# Altium PCB PCB_Controlev2.PcbDoc
Units mm, origin at the board's own origin, x right, y up, seen from the top; angles counter-clockwise.
Board outline 100 x 65 mm, 2 copper layers (Top Layer, Bottom Layer); 12 components, 36 nets, 118 pads, 4 vias.
Unrouted connection lines stored in the file: 2.
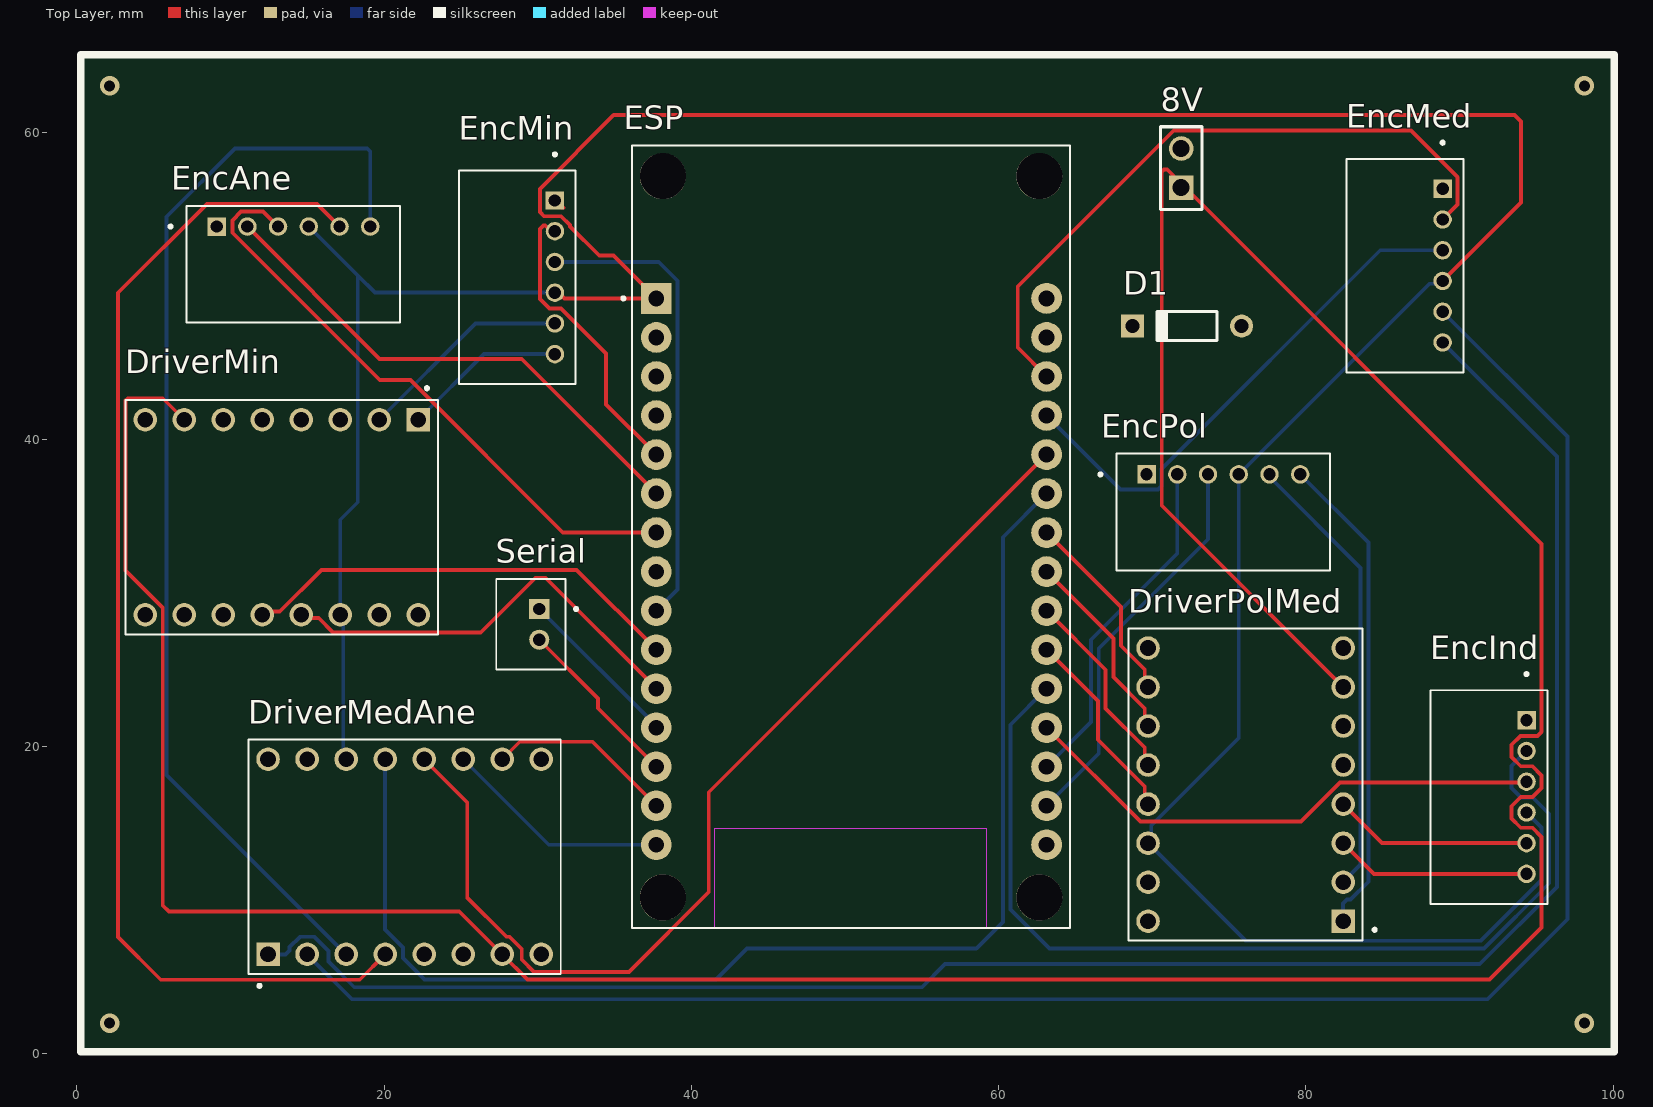
[diagram p0: Top Layer view]
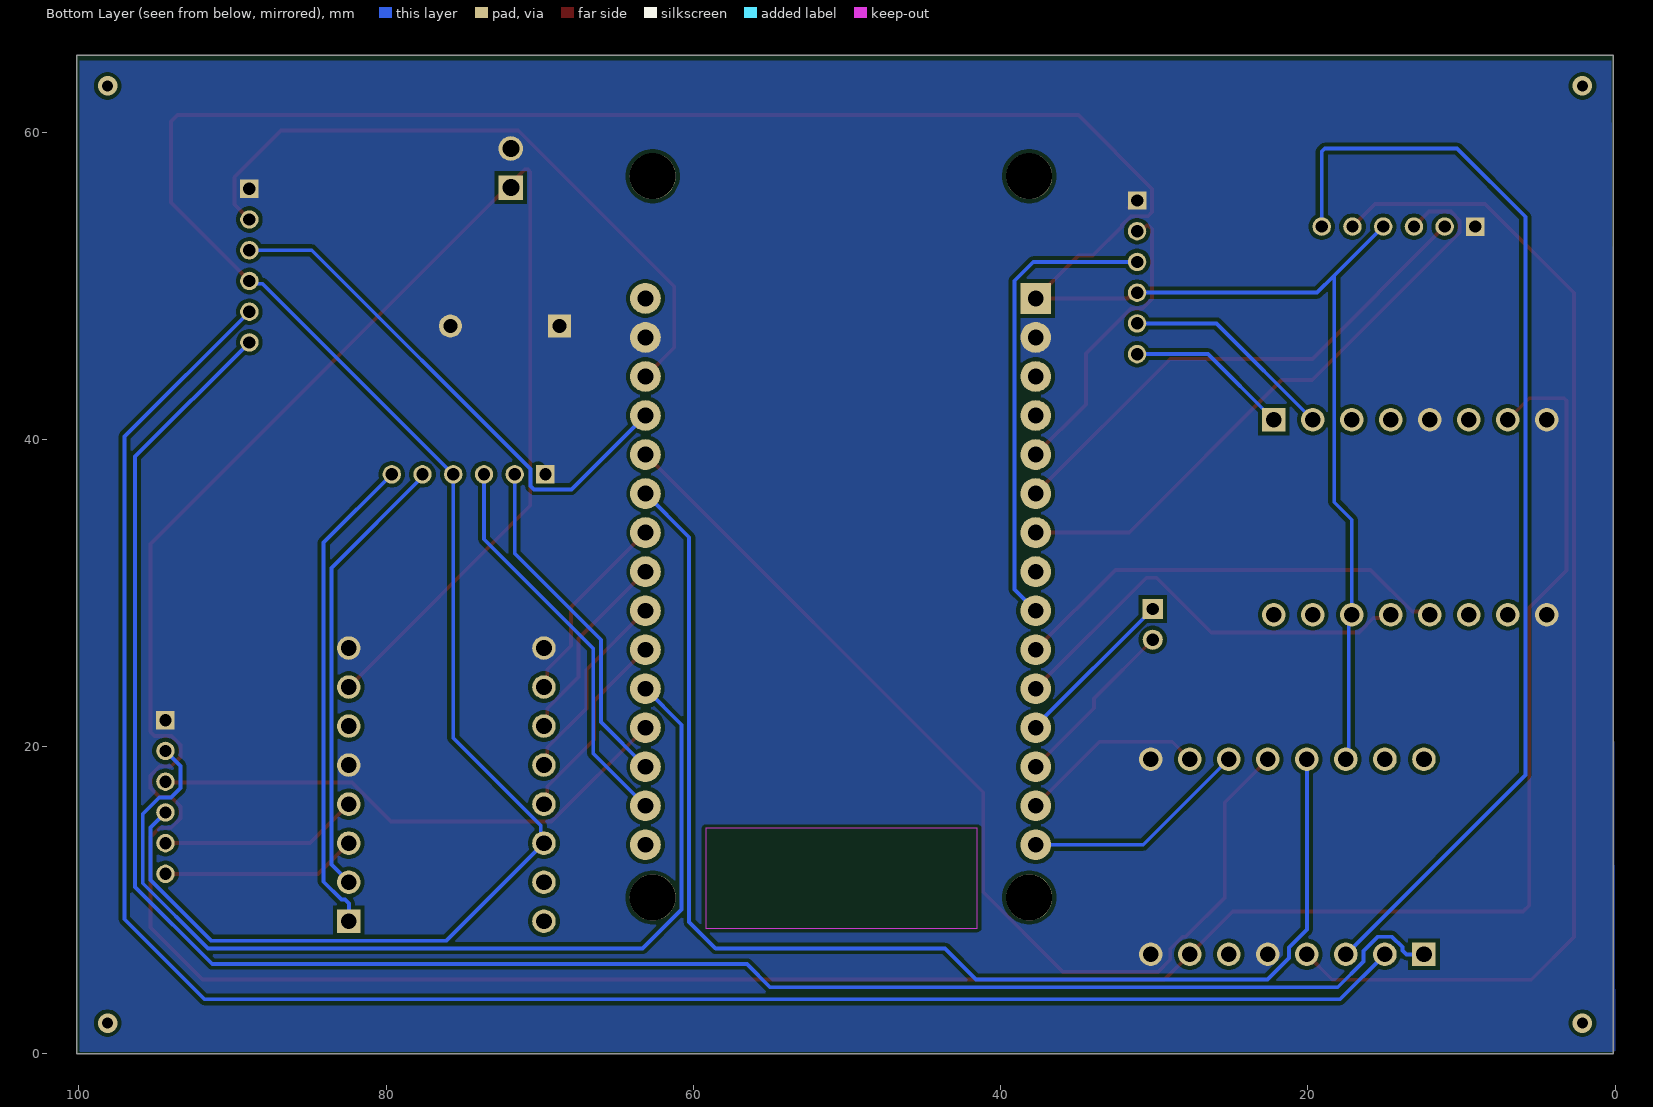
[diagram p1: Bottom Layer view, seen from below]

## Layer stack, top to bottom
Top Solder: solder mask 0.0102, Solder Resist, Dk 3.5
Top Layer: signal copper 0.0356
Dielectric 1: dielectric 0.32, FR-4, Dk 4.8
Bottom Layer: signal copper 0.0356
Bottom Solder: solder mask 0.0102, Solder Resist, Dk 3.5

## Board outline
0.127,0 100.127,0 100.127,65 0.127,65

## Design rules (kind name [scope] priority, off if disabled: settings)
Clearance [All] p1: gap=0.25 ignorepadtopadclearanceinfootprint=FALSE
HoleSize [All] p1: absolutevalues=TRUE maxlimit=1.2 minlimit=0.4 maxpercent=80.000 minpercent=20.000
PolygonConnect [All] p1: connectstyle=Direct reliefconductorwidth=0.254 reliefentries=4 polygonreliefangle="90 Angle" airgapwidth=0.254
RoomDefinition Sheet_Control [InComponentClass('Sheet_Control')] p1: confinementstyle=ConfineIn formatcopy=TRUE lockcomponents=FALSE outline 2.032,2.921 98.425,2.921 98.425,62.865 2.032,62.865
RoutingVias [All] p1: holewidth=0.4 width=1.2 viastyle="Through Hole" minholewidth=0.4 minwidth=1.2 maxholewidth=10 maxwidth=10
SilkToSilkClearance [All] p1: silktosilkclearance=0.25
SolderMaskExpansion [All] p1: expansion=0.102 istentingtop=FALSE
Width [All] p1: maxlimit=10 minlimit=0.25 preferedwidth=0.25
28 further rules are at their usual default settings.

## Components (designator, comment, footprint, x,y, rotation, side; value= is the part's Value field where it differs from the comment)
8V "61300211121" 61300211121 71.882,57.658 r90 top
D1 "Diode 1N4148" DO-35 72.263,47.371 r180 top (schematic designator D?)
DriverMedAne "A4990_STEPPER_MOTOR_DRIVER_CARRIER" MODULE_A4990_STEPPER_MOTOR_DRIVER_CARRIER 21.336,12.827 r90 top
DriverMin "A4990_STEPPER_MOTOR_DRIVER_CARRIER" MODULE_A4990_STEPPER_MOTOR_DRIVER_CARRIER 13.335,34.925 r270 top
DriverPolMed "A4990_STEPPER_MOTOR_DRIVER_CARRIER" MODULE_A4990_STEPPER_MOTOR_DRIVER_CARRIER 76.073,17.526 r180 top
EncAne "S6B-PH-K-S(LF)(SN)" JST_S6B-PH-K-S(LF)(SN) 14.097,53.848 r0 top
EncInd "S6B-PH-K-S(LF)(SN)" JST_S6B-PH-K-S(LF)(SN) 94.361,16.716 r270 top
EncMed "S6B-PH-K-S(LF)(SN)" JST_S6B-PH-K-S(LF)(SN) 88.9,51.308 r270 top
EncMin "S6B-PH-K-S(LF)(SN)" JST_S6B-PH-K-S(LF)(SN) 31.115,50.546 r270 top
EncPol "S6B-PH-K-S(LF)(SN)" JST_S6B-PH-K-S(LF)(SN) 74.628,37.719 r0 top
ESP "ESP32-DEVKIT-V1" ESP32_DEVKIT_V1 50.419,33.655 r0 top
Serial "B2B-PH-K-S" JST_B2B-PH-K-S 29.549,27.956 r90 top

## Footprints (in the part's own frame and the unit in brackets; to place one, negate y for a bottom-side part, rotate by r counter-clockwise, add the part's x,y. Pads: shape width x height; smd on the part's side, far side on the other; paste and mask are expansions set on the pad)
61300211121 [mm] "Pin Header, pitch 2.54 mm, THT, Vertical, single row, 2p"
  rect 1.6x1.6 hole 1.1: 1(-1.27,0)
  round 1.6 hole 1.1: 2(1.27,0)
  silkscreen extent -2.69,-1.35 2.69,1.35, body extent -2.54,-1.27 2.54,1.27, height 8.57
DO-35 [mm] "Diode, Axial; Body 3.8 x 1.9 mm (LxDia. max), Lead Dia. 0.53 mm (max)"
  round 1.5 hole 0.9: 1(-3.55,0)
  rect 1.5x1.5 hole 0.9: 2(3.55,0)
  silkscreen extent -1.95,-0.95 2.05,0.95, body extent -4.06,-1.27 4.06,1.22, height 3.23
ESP32_DEVKIT_V1 [mm]
  rect 2x2 hole 1.02: 1(-12.7,15.515)
  round 2 hole 1.02: 2(-12.7,12.975) 3(-12.7,10.435) 4(-12.7,7.895) 5(-12.7,5.355) 6(-12.7,2.815) 7(-12.7,0.275) 8(-12.7,-2.265) 9(-12.7,-4.805) 10(-12.7,-7.345) 11(-12.7,-9.885) 12(-12.7,-12.425) 13(-12.7,-14.965) 14(-12.7,-17.505) 15(-12.7,-20.045) 16(12.7,-20.045) 17(12.7,-17.505) 18(12.7,-14.965) 19(12.7,-12.425) 20(12.7,-9.885) 21(12.7,-7.345) 22(12.7,-4.805) 23(12.7,-2.265) 24(12.7,0.275) 25(12.7,2.815) 26(12.7,5.355) 27(12.7,7.895) 28(12.7,10.435) 29(12.7,12.975) 30(12.7,15.515)
  round 3 hole 3 unplated: ""(-12.28,-23.475) ""(-12.28,23.475) ""(12.23,-23.475) ""(12.23,23.475)
  Keep-Out Layer region: 8.78,-25.475 -8.91,-25.475 -8.91,-18.985 8.78,-18.985
  Keep-Out Layer region: 8.78,-25.475 -8.91,-25.475 -8.91,-18.985 8.78,-18.985
  Keep-Out Layer region: 8.78,-25.475 -8.91,-25.475 -8.91,-18.985 8.78,-18.985
  silkscreen extent -14.95,-25.48 14.23,25.48, body extent -14.48,-25.5 14.02,25.43, height 9.22
JST_B2B-PH-K-S [mm]
  rect 1.308x1.308 / inner round 1.308 / far side rect 1.308x1.308 hole 0.8: 1(1,-0.55)
  round 1.308 hole 0.8: 2(-1,-0.55)
  silkscreen extent -2.95,-3.05 2.95,2.25, body extent -2.95,-2.25 2.95,2.25, height 6
JST_S6B-PH-K-S(LF)(SN) [mm]
  rect 1.2x1.2 hole 0.8: 1(-5,0)
  round 1.2 hole 0.8: 2(-3,0) 3(-1,0) 4(1,0) 5(3,0) 6(5,0)
  silkscreen extent -8.1,-6.25 6.95,1.35
MODULE_A4990_STEPPER_MOTOR_DRIVER_CARRIER [mm]
  rect 1.53x1.53 hole 1.02: 1(-6.35,8.89)
  round 1.53 hole 1.02: 2(-6.35,6.35) 3(-6.35,3.81) 4(-6.35,1.27) 5(-6.35,-1.27) 6(-6.35,-3.81) 7(-6.35,-6.35) 8(-6.35,-8.89) 9(6.35,-8.89) 10(6.35,-6.35) 11(6.35,-3.81) 12(6.35,-1.27) 13(6.35,1.27) 14(6.35,3.81) 15(6.35,6.35) 16(6.35,8.89)
  silkscreen extent -8.5,-10.16 7.62,10.16

## Part data
8V: "WR-PHD Pin Header, THT, pitch 2.54mm, Single Row, Vertical, 2pin", Contact Resistance=20mOhm, Operating Temperature="-40 to +105degC", Rated Current=3A, Withstanding Voltage=500VAC, Working Voltage=250VAC, ComponentLink1Description=Manufacturer, ComponentLink1URL=http://www.we-online.de, ComponentLink2Description=Datasheet, ComponentLink2URL=https://katalog.we-online.de/em/datasheet/6130xx11121.pdf, Gender=Male, Mounting Technology=THT, Orientation=Vertical, Packaging=Bag, Part Number=61300211121, Pin Number=2, Pitch=2.54mm, Published Date="June 2019", Publisher="Wurth Elektronik", Row Number=Single
D1: "High Conductance Fast Diode", Code_JEDEC=DO-204-AH, ComponentLink1Description="Manufacturer Link", ComponentLink1URL=http://www.fairchildsemi.com/, ComponentLink2Description=Datasheet, ComponentLink2URL=http://www.fairchildsemi.com/ds/1N%2F1N4148.pdf, DatasheetVersion=1997, LatestRevisionDate=17-Jul-2002, LatestRevisionNote="Re-released for DXP Platform.", PackageDescription="Diode, Axial; Body 3.8 x 1.9 mm (LxDia. max), Lead Dia. 0.53 mm (max)", PackageReference=DO-35, Published=8-Jun-2000, Publisher="Altium Limited"
DriverMedAne DriverMin DriverPolMed: "Stepper motor controler; IC: A4990", Package=None, Availability=Unavailable, MP=A4988_STEPPER_MOTOR_DRIVER_CARRIER, Price=None
EncAne EncInd EncMed EncMin EncPol: "PH Series 6 Position 2 mm Pitch Through Hole Side Entry Shrouded Header", Package=None, Availability=Unavailable, MP=S6B-PH-K-S(LF)(SN), Price=None
ESP: "Dual core, Wi-Fi: 2.4 GHz up to 150 Mbits/s,BLE (Bluetooth Low Energy) and legacy Bluetooth, 32 bits, Up to 240 MHz", Package=None, Availability="Not in stock", Check_prices=https://www.snapeda.com/parts/ESP32-DEVKIT-V1/Do+it/view-part/?ref=eda, MF="Do it", MP=ESP32-DEVKIT-V1, Price=None, SnapEDA_Link=https://www.snapeda.com/parts/ESP32-DEVKIT-V1/Do+it/view-part/?ref=snap
Serial: "Connector Header Through Hole 2 position 0.079 (2.00mm)", Package=None, Check_prices=https://www.snapeda.com/parts/B2B-PH-K-S/JST/view-part/?ref=eda, MF="JST Sales America Inc.", MP=B2B-PH-K-S, SnapEDA_Link=https://www.snapeda.com/parts/B2B-PH-K-S/JST/view-part/?ref=snap

## Via types
v1: diameter 1.27, hole 0.711, Top Layer to Bottom Layer, 4 vias

## Nets (pads, with @x,y where several pads share a name; then routed paths per layer and width w, separated by ;. In a path a pad name is that pad's centre, name@x,y a point inside that pad or via, vN(x,y) a via of type N, cw(c..) or ccw(c..) an arc to the next point about the centre after c; other vN are vias at no path point)
Net8V_1: 8V.1 D1.1 DriverMedAne.7 DriverMin.7 DriverPolMed.7 | length 234.9
  Top Layer w0.25: DriverMin.7 5.588,42.672 3.321,42.672 3.175,42.526 3.175,31.457 5.585,29.047 5.585,9.674 5.988,9.271 24.892,9.271 DriverMedAne.7 29.326,4.837 91.959,4.837 95.336,8.214 95.336,14.12 94.74,14.716 93.982,14.716 93.386,15.312 93.386,16.12 93.982,16.716 94.74,16.716 95.336,17.312 95.336,18.12 94.74,18.716 93.982,18.716 93.386,19.312 93.386,20.12 93.957,20.691 95.066,20.691 95.336,20.961 95.336,33.188 70.971,57.553 70.764,57.553 70.618,57.406 70.618,35.681 DriverPolMed.7
Net8V_2: 8V.2 DriverMedAne.5 DriverMedAne.8 DriverMedAne.9 DriverMin.5 DriverMin.8 DriverMin.9 DriverPolMed.5 DriverPolMed.8 DriverPolMed.9 EncAne.1 EncInd.1 EncMed.1 EncMin.1 EncPol.1 ESP.2 ESP.29 | length 2.2
  Top Layer w0.25: DriverMedAne.9@30.226,19.158 DriverMedAne.9 ; EncMin.1 31.59,55.071 EncMin.1@31.676,55.071 ; EncPol.1 EncPol.1@69.723,37.624 ; DriverPolMed.5 DriverPolMed.5@82.635,19.008 ; DriverPolMed.8 DriverPolMed.8@82.658,26.181
  Bottom Layer w0.25: EncPol.1 EncPol.1@70.103,38.194
NetD?_2: D1.2 ESP.30
NetDriverMedAne_1: DriverMedAne.1 EncMed.6 | length 127.5
  Bottom Layer w0.25: DriverMedAne.1 13.586,6.477 13.846,6.737 13.846,6.949 14.514,7.617 15.458,7.617 16.386,6.689 16.386,6.005 18.054,4.337 55.01,4.337 56.515,5.842 91.313,5.842 96.336,10.865 96.336,38.872 EncMed.6
NetDriverMedAne_2: DriverMedAne.2 EncMed.5 | length 128.3
  Bottom Layer w0.25: DriverMedAne.2 17.907,3.556 91.821,3.556 97.028,8.763 97.028,40.18 EncMed.5
NetDriverMedAne_3: DriverMedAne.3 EncAne.6 | length 72.9
  Bottom Layer w0.25: DriverMedAne.3 5.845,18.158 5.845,54.486 10.287,58.928 18.904,58.928 19.097,58.735 EncAne.6
NetDriverMedAne_4: DriverMedAne.4 EncAne.5 | length 78.6
  Top Layer w0.25: EncAne.5 15.622,55.323 8.46,55.323 2.675,49.538 2.675,7.612 5.461,4.826 18.415,4.826 DriverMedAne.4
NetDriverMedAne_10: DriverMedAne.10 ESP.14 | length 12.2
  Top Layer w0.25: DriverMedAne.10 28.826,20.317 33.552,20.317 ESP.14
NetDriverMedAne_11: DriverMedAne.11 ESP.15 | length 14.9
  Bottom Layer w0.25: DriverMedAne.11 30.713,13.61 ESP.15
NetDriverMedAne_12: DriverMedAne.12 ESP.26 | length 68
  Top Layer w0.25: DriverMedAne.12 25.405,16.378 25.405,10.174 27.959,7.62 28.155,7.62 28.954,6.821 28.954,6.136 29.754,5.337 35.948,5.337 41.134,10.523 41.134,17.025 ESP.26
NetDriverMedAne_13: DriverMedAne.13 ESP.25 | length 83.7
  Bottom Layer w0.25: DriverMedAne.13 20.066,8.089 21.222,6.933 21.222,6.248 22.634,4.837 41.607,4.837 43.628,6.858 58.547,6.858 60.274,8.585 60.274,33.625 ESP.25
NetDriverMedAne_14: DriverMedAne.14 DriverMin.14 DriverPolMed.14 EncAne.4 EncInd.4 EncMed.4 EncMin.4 EncPol.4 ESP.1 | length 226.3
  Top Layer w0.25: EncMin.4 31.372,49.546 31.748,49.17 ESP.1 34.935,51.954 33.999,51.954 32.09,53.864 32.09,53.95 31.519,54.521 30.41,54.521 30.14,54.791 30.14,56.301 34.942,61.103 93.583,61.103 93.999,60.687 93.999,55.407 EncMed.4
  Bottom Layer w0.25: EncAne.4 18.285,50.66 ; DriverMedAne.14 17.335,19.367 17.335,28.384 DriverMin.14 17.145,34.764 18.285,35.904 18.285,50.66 ; EncMin.4 19.399,49.546 18.285,50.66 ; EncMed.4 88.718,50.126 88.035,50.126 EncPol.4 75.628,20.549 69.935,14.856 69.935,13.928 DriverPolMed.14 76.073,7.366 91.39,7.366 95.336,11.312 95.336,14.741 EncInd.4
NetDriverMin_1: DriverMin.1 EncMin.6 | length 10.7
  Bottom Layer w0.25: DriverMin.1 26.496,45.546 EncMin.6
NetDriverMin_2: DriverMin.2 EncMin.5 | length 14
  Bottom Layer w0.25: DriverMin.2 25.956,47.546 EncMin.5
NetDriverMin_12: DriverMin.12 ESP.10 | length 29
  Top Layer w0.25: DriverMin.12 12.277,28.787 13.205,28.787 15.914,31.496 32.533,31.496 ESP.10
NetDriverMin_13: DriverMin.13 ESP.11 | length 28
  Top Layer w0.25: DriverMin.13 14.817,28.363 15.745,28.363 16.673,27.435 26.292,27.435 29.845,30.988 30.501,30.988 ESP.11
NetDriverPolMed_1: DriverPolMed.1 EncPol.6 | length 31.7
  Bottom Layer w0.25: EncPol.6 84.063,33.284 84.063,11.204 82.895,10.036 82.683,10.036 82.423,9.776 DriverPolMed.1
NetDriverPolMed_2: DriverPolMed.2 EncPol.5 | length 29.5
  Bottom Layer w0.25: EncPol.5 77.628,37.561 83.563,31.626 83.563,12.316 DriverPolMed.2
NetDriverPolMed_3: DriverPolMed.3 EncInd.6 | length 12.8
  Top Layer w0.25: DriverPolMed.3 84.423,11.716 EncInd.6
NetDriverPolMed_4: DriverPolMed.4 EncInd.5 | length 13
  Top Layer w0.25: DriverPolMed.4 84.963,13.716 EncInd.5
NetDriverPolMed_10: DriverPolMed.10 ESP.24 | length 12.8
  Top Layer w0.25: ESP.24 67.966,29.083 67.966,26.561 69.511,25.016 69.511,24.088 DriverPolMed.10
NetDriverPolMed_11: DriverPolMed.11 ESP.23 | length 12.8
  Top Layer w0.25: ESP.23 67.466,27.043 67.466,24.521 69.511,22.476 69.511,21.548 DriverPolMed.11
NetDriverPolMed_12: DriverPolMed.12 ESP.22 | length 12.8
  Top Layer w0.25: ESP.22 66.966,25.003 66.966,22.481 69.511,19.936 69.511,19.008 DriverPolMed.12
NetDriverPolMed_13: DriverPolMed.13 ESP.21 | length 12.8
  Top Layer w0.25: ESP.21 66.466,22.963 66.466,20.441 69.511,17.396 69.511,16.468 DriverPolMed.13
NetEncAne_2: EncAne.2 ESP.6 | length 33.8
  Top Layer w0.25: EncAne.2 19.709,45.236 28.953,45.236 ESP.6
NetEncAne_3: EncAne.3 ESP.7 | length 40.1
  Top Layer w0.25: EncAne.3 12.122,54.823 10.693,54.823 10.122,54.252 10.122,53.444 19.712,43.854 21.706,43.854 31.63,33.93 ESP.7
NetEncInd_2: EncInd.2 ESP.20 | length 63.7
  Bottom Layer w0.25: ESP.20 60.774,21.425 60.774,9.403 63.311,6.866 91.597,6.866 95.836,11.105 95.836,15.62 94.765,16.691 94.007,16.691 93.386,17.312 93.386,18.741 EncInd.2
NetEncInd_3: EncInd.3 ESP.19 | length 34.9
  Top Layer w0.25: ESP.19 69.233,15.116 79.671,15.116 82.211,17.656 94.301,17.656 EncInd.3
NetEncMed_2: EncMed.2 ESP.28 | length 43.9
  Top Layer w0.25: ESP.28 61.244,45.965 61.244,49.952 71.395,60.103 86.835,60.103 89.875,57.063 89.875,55.283 EncMed.2
NetEncMed_3: EncMed.3 ESP.27 | length 34.9
  Bottom Layer w0.25: ESP.27 67.925,36.744 70.383,36.744 70.603,36.964 70.603,38.073 84.838,52.308 EncMed.3
NetEncMin_2: EncMin.2 ESP.5 | length 19.5
  Top Layer w0.25: EncMin.2 30.858,53.546 30.486,53.917 30.376,53.917 30.14,53.681 30.14,49.142 30.761,48.521 31.519,48.521 34.452,45.588 34.452,42.277 ESP.5
NetEncMin_3: EncMin.3 ESP.9 | length 30.5
  Bottom Layer w0.25: EncMin.3 37.873,51.546 39.094,50.325 39.094,30.225 ESP.9
NetEncPol_2: EncPol.2 ESP.18 | length 22.6
  Bottom Layer w0.25: ESP.18 66.018,21.589 66.018,26.958 71.628,32.567 EncPol.2
NetEncPol_3: EncPol.3 ESP.17 | length 25.9
  Bottom Layer w0.25: ESP.17 66.518,19.549 66.518,26.386 73.628,33.496 EncPol.3
NetESP_12: ESP.12 Serial.1 | length 10.9
  Bottom Layer w0.25: Serial.1 37.719,21.336 ESP.12
NetESP_13: ESP.13 Serial.2 | length 11.4
  Top Layer w0.25: Serial.2 33.914,23.141 33.914,22.495 ESP.13
pads on no net: DriverMedAne.6 DriverMedAne.15 DriverMedAne.16 DriverMin.3 DriverMin.4 DriverMin.6 DriverMin.10 DriverMin.11 DriverMin.15 DriverMin.16 DriverPolMed.6 DriverPolMed.15 DriverPolMed.16 ESP. ESP.3 ESP.4 ESP.8 ESP.16
copper on no net:
  other v1: 2.127,2 98.127,2 2.127,63 98.127,63

## Polygon pours and split planes (outlines as drawn)
Net8V_2 on Bottom Layer "NET8V_2_L02_P000" (solid, pour order 0): 0,0.127 100.076,0.127 99.949,0.254 99.949,64.643 0.254,64.643

## Silkscreen, mask and mechanical layers (free items; w line width, h text height)
Top Overlay:
  lines w0.5: 0.254,0.127 100.076,0.127 100.076,65.024 0.254,65.024 0.254,0.127